# Altium PCB reg_PCB.PcbDoc
Units mm, origin at the board's own origin, x right, y up, seen from the top; angles counter-clockwise.
Board outline 257.2 x 94.8 mm, 4 copper layers (Top Layer, Layer 2, Layer 3, Bottom Layer), stack 0.742 mm thick; 88 components, 30 nets, 176 pads, 45 vias.
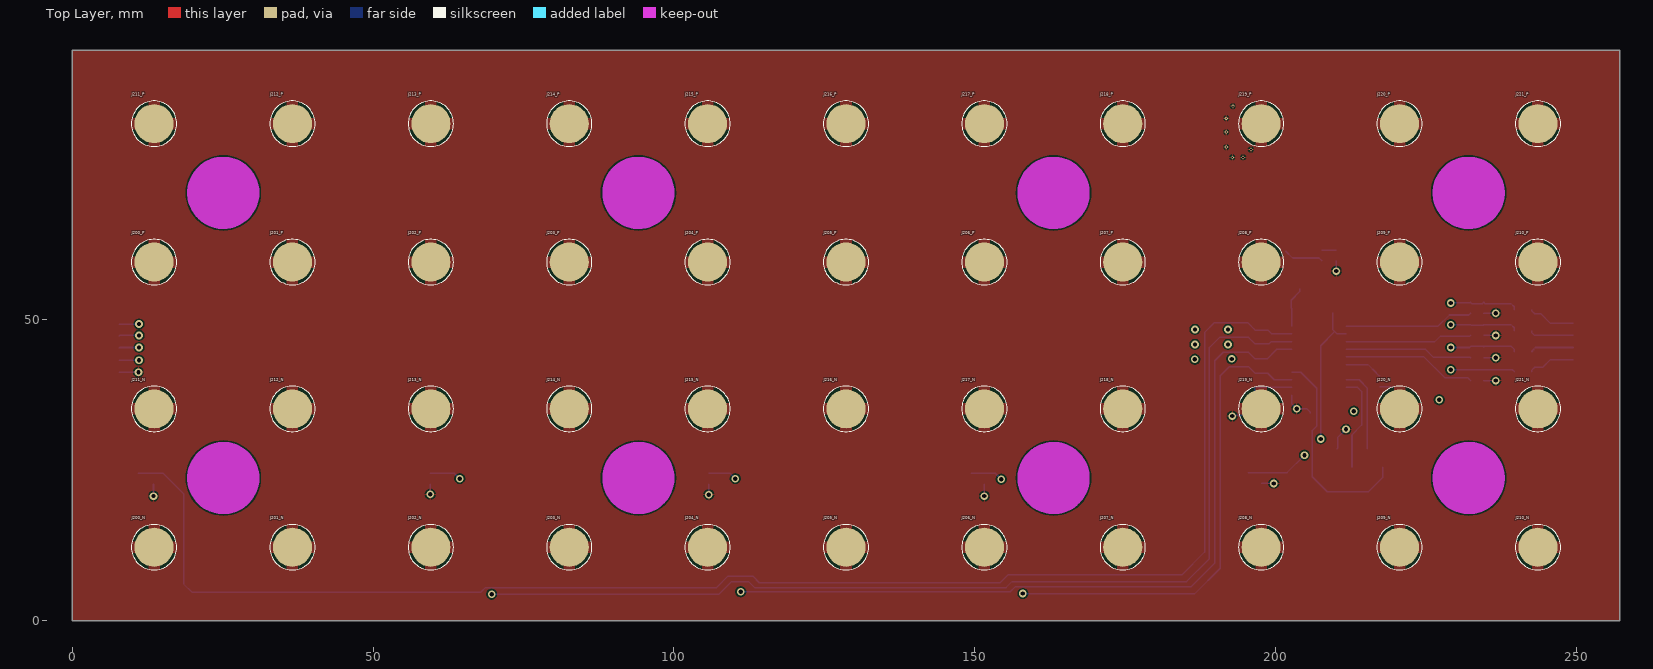
[diagram p0: Top Layer view]
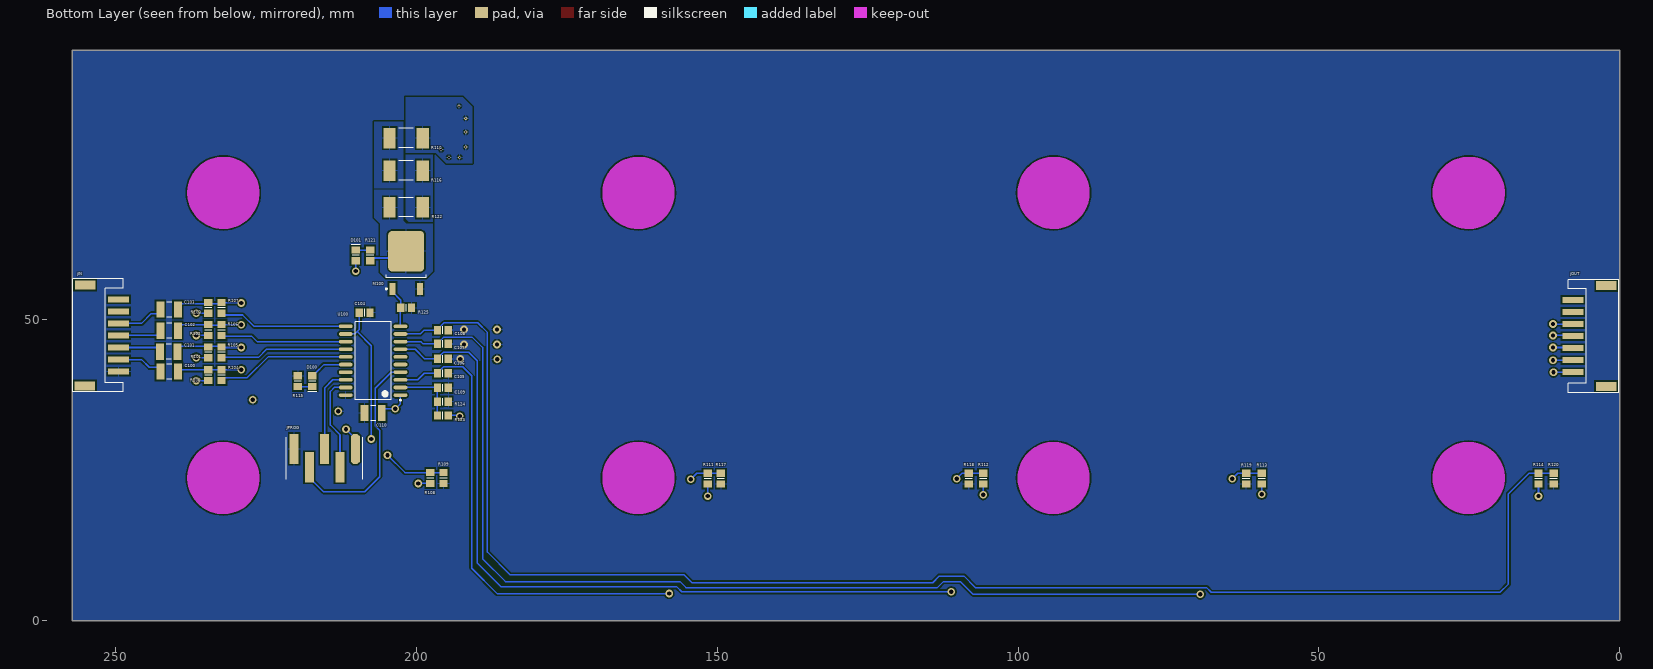
[diagram p1: Bottom Layer view, seen from below]
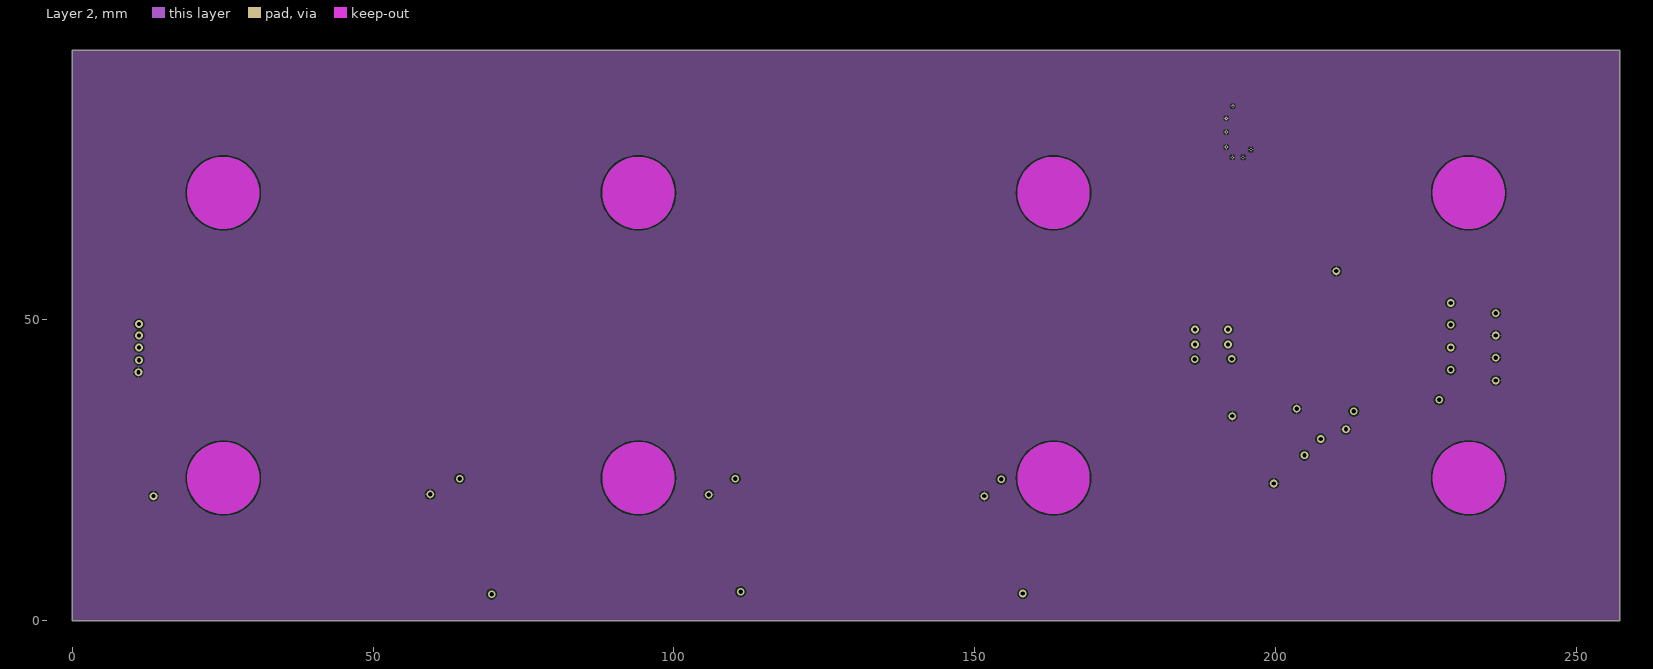
[diagram p2: Layer 2]
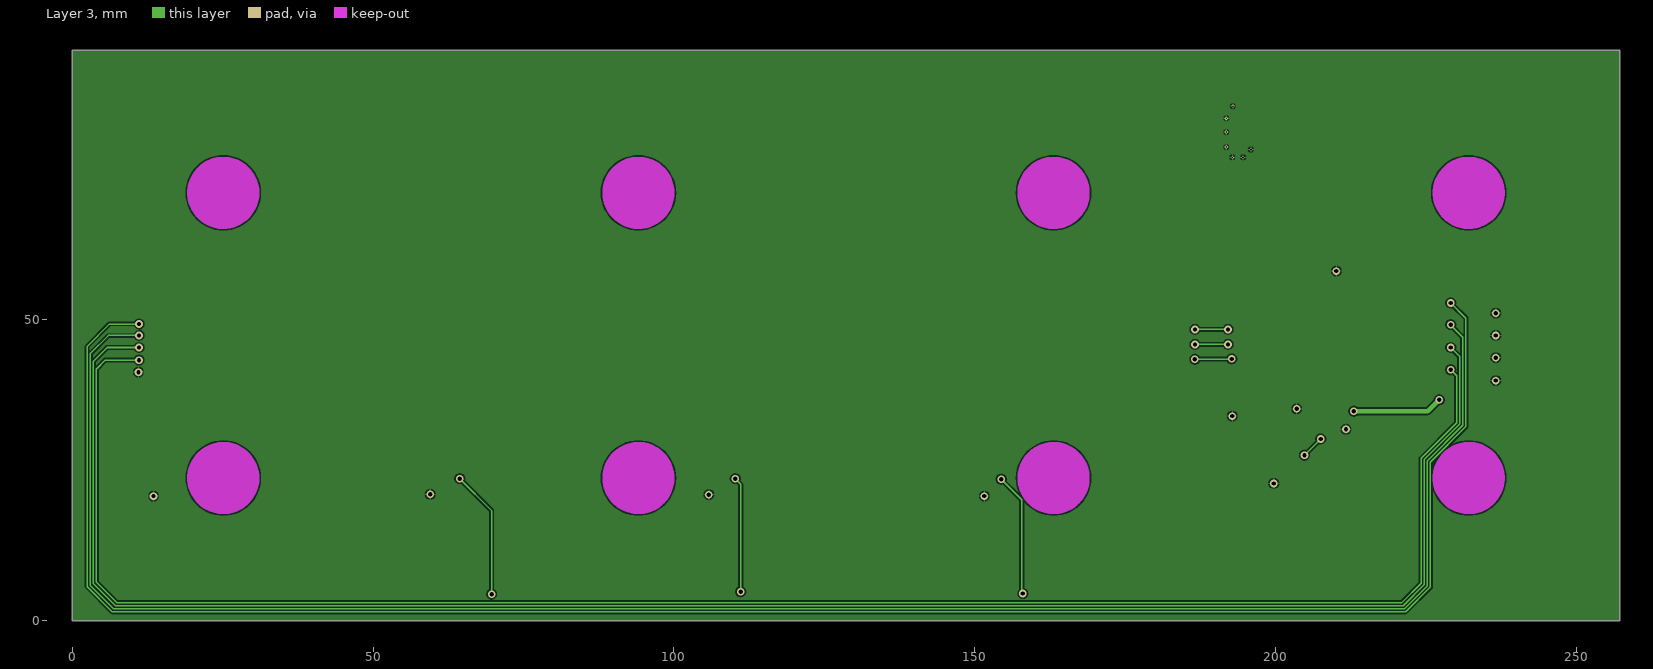
[diagram p3: Layer 3]

## Layer stack, top to bottom
Top Solder: solder mask 0.0102, Solder Resist, Dk 3.5
Top Layer: signal copper 0.07
Dielectric 2: prepreg 0.0711, PP-006, Dk 4.1
Layer 2: signal copper 0.07
Dielectric 1: dielectric 0.32, FR-4, Dk 4.8
Layer 3: signal copper 0.07
Dielectric 3: prepreg 0.0711, PP-006, Dk 4.1
Bottom Layer: signal copper 0.07
Bottom Solder: solder mask 0.0102, Solder Resist, Dk 3.5

## Board outline
0,0 257.2,0 257.2,94.8 0,94.8

## Design rules (kind name [scope] priority, off if disabled: settings)
Clearance [All] p1: gap=0.254 ignorepadtopadclearanceinfootprint=FALSE except(0: SMDPad-Hole THPad-Hole Via-Hole Fill-Hole Poly-Hole Region-Hole Text-Hole; 0.127: SMDPad-SMDPad; 0.15: Arc-Text Track-Text SMDPad-Text THPad-Text Via-Text Fill-Text Poly-Text Region-Text Text-Text; 0.2: Arc-SMDPad Arc-Hole Track-SMDPad Track-Hole; 0.5: SMDPad-THPad)
HoleSize [All] p1: absolutevalues=TRUE maxlimit=6.3 minlimit=0.025 maxpercent=80.000 minpercent=20.000
PolygonConnect [All] p1: connectstyle=Relief reliefconductorwidth=0.254 reliefentries=4 polygonreliefangle="90 Angle" airgapwidth=0.254
RoutingVias [All] p1: holewidth=0.25 width=0.52 viastyle="Through Hole" minholewidth=0.2 minwidth=0.46 maxholewidth=2 maxwidth=4
SilkToSolderMaskClearance [IsPad] p1: minsilkscreentomaskgap=0.15 clearancetoexposedcopper=TRUE
SolderMaskExpansion [All] p1: expansion=0.102 istentingtop=FALSE
Width [All] p1: maxlimit=5 minlimit=0.2 preferedwidth=0.25
28 further rules are at their usual default settings.

## Classes and differential pairs
channel class "Pg2 Battery Contacts": N P
component class P: J200_P J201_P J202_P J203_P J204_P J205_P J206_P J207_P J208_P J209_P J210_P J211_P J212_P J213_P J214_P J215_P J216_P J217_P J218_P J219_P J220_P J221_P
component class "Pg1 Microcontroller": C100 C101 C102 C103 C104 C105 C106 C107 C108 C109 C110 D100 D101 jIN jOUT JPROG M100 R100 R101 R102 R103 R104 R105 R106 R107 R108 R109 R110 R111 R112 R113 R114 R115 R116 R117 R118 R119 R120 R121 R122 R123 R124 R125 U100
component class N: J200_N J201_N J202_N J203_N J204_N J205_N J206_N J207_N J208_N J209_N J210_N J211_N J212_N J213_N J214_N J215_N J216_N J217_N J218_N J219_N J220_N J221_N

## Components (designator, comment, footprint, x,y, rotation, side; value= is the part's Value field where it differs from the comment)
C100 "C1210C106K3RACAUTO" CAPC3225N 241.1,41.4 r180 bottom value=10µF
C101 "C1210C106K3RACAUTO" CAPC3225N 241.15,44.7 r180 bottom value=10µF
C102 "C1210C106K3RACAUTO" CAPC3225N 241.1,48.2 r180 bottom value=10µF
C103 "C1210C106K3RACAUTO" CAPC3225N 241.1,51.7 r180 bottom value=10µF
C104 "C0805C104K1RACAUTO" CAPC2012N 208.6,51.2 r180 bottom value=100nF
C105 "C0805C104K1RACAUTO" CAPC2012N 195.6,41.1 r180 bottom value=100nF
C106 "C0805C104K1RACAUTO" CAPC2012N 195.6,43.5 r180 bottom value=100nF
C107 "C0805C104K1RACAUTO" CAPC2012N 195.6,46 r180 bottom value=100nF
C108 "C0805C104K1RACAUTO" CAPC2012N 195.6,48.3 r180 bottom value=100nF
C109 "C0805C104K1RACAUTO" CAPC2012N 195.6,38.7 r180 bottom value=100nF
C110 "C1210C106K3RACAUTO" CAPC3225N 207.2,34.5 r180 bottom value=10µF
D100 "LTST-C170GKT" DIO2012N-G 217.3,39.8 r270 bottom value=GRN
D101 "LTST-C170KRKT" DIO2012N-R 210.1,60.7 r90 bottom value=RED
J200_N "2036-3-57-15-00-00-03-0" "6mm Pad" 13.6,12.2 r0 top locked (schematic designator J200)
J200_P "2036-3-57-15-00-00-03-0" "6mm Pad" 13.6,59.6 r0 top (schematic designator J200)
J201_N "2036-3-57-15-00-00-03-0" "6mm Pad" 36.6,12.2 r0 top locked (schematic designator J201)
J201_P "2036-3-57-15-00-00-03-0" "6mm Pad" 36.6,59.6 r0 top (schematic designator J201)
J202_N "2036-3-57-15-00-00-03-0" "6mm Pad" 59.6,12.2 r0 top locked (schematic designator J202)
J202_P "2036-3-57-15-00-00-03-0" "6mm Pad" 59.6,59.6 r0 top (schematic designator J202)
J203_N "2036-3-57-15-00-00-03-0" "6mm Pad" 82.6,12.2 r0 top locked (schematic designator J203)
J203_P "2036-3-57-15-00-00-03-0" "6mm Pad" 82.6,59.6 r0 top (schematic designator J203)
J204_N "2036-3-57-15-00-00-03-0" "6mm Pad" 105.6,12.2 r0 top locked (schematic designator J204)
J204_P "2036-3-57-15-00-00-03-0" "6mm Pad" 105.6,59.6 r0 top (schematic designator J204)
J205_N "2036-3-57-15-00-00-03-0" "6mm Pad" 128.6,12.2 r0 top locked (schematic designator J205)
J205_P "2036-3-57-15-00-00-03-0" "6mm Pad" 128.6,59.6 r0 top (schematic designator J205)
J206_N "2036-3-57-15-00-00-03-0" "6mm Pad" 151.6,12.2 r0 top locked (schematic designator J206)
J206_P "2036-3-57-15-00-00-03-0" "6mm Pad" 151.6,59.6 r0 top (schematic designator J206)
J207_N "2036-3-57-15-00-00-03-0" "6mm Pad" 174.6,12.2 r0 top locked (schematic designator J207)
J207_P "2036-3-57-15-00-00-03-0" "6mm Pad" 174.6,59.6 r0 top (schematic designator J207)
J208_N "2036-3-57-15-00-00-03-0" "6mm Pad" 197.6,12.2 r0 top locked (schematic designator J208)
J208_P "2036-3-57-15-00-00-03-0" "6mm Pad" 197.6,59.6 r0 top (schematic designator J208)
J209_N "2036-3-57-15-00-00-03-0" "6mm Pad" 220.6,12.2 r0 top locked (schematic designator J209)
J209_P "2036-3-57-15-00-00-03-0" "6mm Pad" 220.6,59.6 r0 top (schematic designator J209)
J210_N "2036-3-57-15-00-00-03-0" "6mm Pad" 243.6,12.2 r0 top locked (schematic designator J210)
J210_P "2036-3-57-15-00-00-03-0" "6mm Pad" 243.6,59.6 r0 top (schematic designator J210)
J211_N "2036-3-57-15-00-00-03-0" "6mm Pad" 13.6,35.2 r0 top locked (schematic designator J211)
J211_P "2036-3-57-15-00-00-03-0" "6mm Pad" 13.6,82.6 r0 top (schematic designator J211)
J212_N "2036-3-57-15-00-00-03-0" "6mm Pad" 36.6,35.2 r0 top locked (schematic designator J212)
J212_P "2036-3-57-15-00-00-03-0" "6mm Pad" 36.6,82.6 r0 top (schematic designator J212)
J213_N "2036-3-57-15-00-00-03-0" "6mm Pad" 59.6,35.2 r0 top locked (schematic designator J213)
J213_P "2036-3-57-15-00-00-03-0" "6mm Pad" 59.6,82.6 r0 top (schematic designator J213)
J214_N "2036-3-57-15-00-00-03-0" "6mm Pad" 82.6,35.2 r0 top locked (schematic designator J214)
J214_P "2036-3-57-15-00-00-03-0" "6mm Pad" 82.6,82.6 r0 top (schematic designator J214)
J215_N "2036-3-57-15-00-00-03-0" "6mm Pad" 105.6,35.2 r0 top locked (schematic designator J215)
J215_P "2036-3-57-15-00-00-03-0" "6mm Pad" 105.6,82.6 r0 top (schematic designator J215)
J216_N "2036-3-57-15-00-00-03-0" "6mm Pad" 128.6,35.2 r0 top locked (schematic designator J216)
J216_P "2036-3-57-15-00-00-03-0" "6mm Pad" 128.6,82.6 r0 top (schematic designator J216)
J217_N "2036-3-57-15-00-00-03-0" "6mm Pad" 151.6,35.2 r0 top locked (schematic designator J217)
J217_P "2036-3-57-15-00-00-03-0" "6mm Pad" 151.6,82.6 r0 top (schematic designator J217)
J218_N "2036-3-57-15-00-00-03-0" "6mm Pad" 174.6,35.2 r0 top locked (schematic designator J218)
J218_P "2036-3-57-15-00-00-03-0" "6mm Pad" 174.6,82.6 r0 top (schematic designator J218)
J219_N "2036-3-57-15-00-00-03-0" "6mm Pad" 197.6,35.2 r0 top locked (schematic designator J219)
J219_P "2036-3-57-15-00-00-03-0" "6mm Pad" 197.6,82.6 r0 top (schematic designator J219)
J220_N "2036-3-57-15-00-00-03-0" "6mm Pad" 220.6,35.2 r0 top locked (schematic designator J220)
J220_P "2036-3-57-15-00-00-03-0" "6mm Pad" 220.6,82.6 r0 top (schematic designator J220)
J221_N "2036-3-57-15-00-00-03-0" "6mm Pad" 243.6,35.2 r0 top locked (schematic designator J221)
J221_P "2036-3-57-15-00-00-03-0" "6mm Pad" 243.6,82.6 r0 top (schematic designator J221)
jIN "S7B-PH-SM4-TB(LF)(SN)" JST-PH-S7 249.5,47.4 r90 bottom
jOUT "S7B-PH-SM4-TB(LF)(SN)" JST-PH-S7 7.8,47.3 r270 bottom
JPROG "3-647167-5" "HDR1X5 SMT" 215.24,27.02 r0 bottom
M100 "AOD454A" TO252-3N 201.7,59.5 r90 bottom value="30mOhm @ 10V"
R100 "ERJ-6ENF1003V" RESC2012N 234.6,40.8 r270 bottom value=100k
R101 "ERJ-6ENF1003V" RESC2012N 234.6,44.6 r90 bottom value=100k
R102 "ERJ-6ENF1003V" RESC2012N 234.6,48.3 r270 bottom value=100k
R103 "ERJ-6ENF1003V" RESC2012N 234.6,52 r90 bottom value=100k
R104 "ERJ-6ENF10R0V" RESC2012N 232.4,40.8 r90 bottom value=10
R105 "ERJ-6ENF10R0V" RESC2012N 232.4,44.6 r270 bottom value=10
R106 "ERJ-6ENF10R0V" RESC2012N 232.4,48.3 r90 bottom value=10
R107 "ERJ-6ENF10R0V" RESC2012N 232.4,52 r270 bottom value=10
R108 "NT08105F4050B1F" RESC2012N 197.7,23.7 r90 bottom value=100k
R109 "ERJ-6ENF1003V" RESC2012N 195.5,23.7 r90 bottom value=100k
R110 "35221R0JT" RESC6432N 201.7,80.2 r180 bottom value=1
R111 "NT08105F4050B1F" RESC2012N 151.6,23.6 r90 bottom value=100k
R112 "NT08105F4050B1F" RESC2012N 105.8,23.6 r90 bottom value=100k
R113 "NT08105F4050B1F" RESC2012N 59.5,23.6 r90 bottom value=100k
R114 "NT08105F4050B1F" RESC2012N 13.5,23.6 r90 bottom value=100k
R115 "ERJ-6ENF1002V" RESC2012N 219.7,39.8 r270 bottom value=10k
R116 "35221R0JT" RESC6432N 201.7,74.8 r0 bottom value=1
R117 "ERJ-6ENF1003V" RESC2012N 149.4,23.6 r90 bottom value=100k
R118 "ERJ-6ENF1003V" RESC2012N 108.2,23.6 r90 bottom value=100k
R119 "ERJ-6ENF1003V" RESC2012N 62.1,23.6 r90 bottom value=100k
R120 "ERJ-6ENF1003V" RESC2012N 11,23.6 r90 bottom value=100k
R121 "ERJ-6ENF1002V" RESC2012N 207.7,60.7 r90 bottom value=10k
R122 "35221R0JT" RESC6432N 201.7,68.7 r180 bottom value=1
R123 "ERJ-6ENF4993V" RESC2012N 195.6,34.1 r180 bottom value=499k
R124 "ERJ-6ENF1004V" RESC2012N 195.6,36.4 r0 bottom value=1Meg
R125 "ERJ-6ENF1002V" RESC2012N 201.7,52 r0 bottom value=10k
U100 "PIC16F1508T-I/SO" SOIC-20-300 207.2,43.2 r0 bottom value=32MHz

## Footprints (in the part's own frame and the unit in brackets; to place one, negate y for a bottom-side part, rotate by r counter-clockwise, add the part's x,y. Pads: shape width x height; smd on the part's side, far side on the other; paste and mask are expansions set on the pad)
"6mm Pad" [mm] "Pad, 6mm"
  round 6.5 smd mask+0.508: 1(0,0)
  silkscreen extent -3.78,-3.77 3.78,3.77, body extent -3,-3 3,3, height 1.4
CAPC2012N [mm] "Chip Capacitor, Body 2.0x1.3mm, IPC Medium Density"
  rect 1.2x1.4 smd: 1(-0.9,0) 2(0.9,0)
  silkscreen extent 0,-0.6 0,0.6, body extent -1.07,-0.7 1.07,0.7, height 0.7
CAPC3225N [mm] "Chip Capacitor Body 3.2x2.5mm, IPC Medium Density"
  rect 1.3x2.7 smd: 1(-1.45,0) 2(1.45,0)
  silkscreen extent -0.4,-1.25 0.4,1.25, body extent -1.67,-1.32 1.67,1.32, height 1.5
DIO2012N-G [mm] "Chip Diode, Body 2.0x1.2mm, Medium Density"
  rect 1.2x1.4 smd: 1(-0.9,0) 2(0.9,0)
  silkscreen extent 0,-0.76 1.78,0.76, body extent -1.07,-0.7 1.07,0.7, height 0.7
DIO2012N-R [mm] "Chip Diode, Body 2.0x1.2mm, Medium Density"
  rect 1.2x1.4 smd: 1(-0.9,0) 2(0.9,0)
  silkscreen extent 0,-0.76 1.78,0.76, body extent -1.07,-0.7 1.07,0.7, height 0.7
"HDR1X5 SMT" [mm] "Connector; Header; Surface Mounted; 5 Position"
  oct 1.5x5 smd: 1(-5.08,-1.52)
  rect 1.5x5 smd: 2(-2.54,1.52) 3(0,-1.52) 4(2.54,1.52) 5(5.08,-1.52)
  silkscreen extent -6.36,-3.5 6.36,3.5, body extent -6.36,-3.55 6.36,2.85, height 10.67
JST-PH-S7 [mm] "Locking Connector; Side-Entry; Header; 7-Pin, 2mm pitch"
  rect 1x3.5 smd: 1(-6,0) 2(-4,0) 3(-2,0) 4(0,0) 5(2,0) 6(4,0) 7(6,0)
  rect 1.5x3.4 smd: 8(-8.382,5.588) 9(8.35,5.55)
  silkscreen extent -9.4,-0.76 9.4,7.62, body extent -8.95,-1.49 8.95,7.11, height 5.5
RESC2012N [mm] "Chip Resistor, Body 2.0x1.2mm, IPC Medium Density"
  rect 1.2x1.4 smd: 1(-0.9,0) 2(0.9,0)
  silkscreen extent 0,-0.6 0,0.6, body extent -1.07,-0.7 1.07,0.7, height 0.7
RESC6432N [mm] "Chip Resistor, Body 6.4x3.2mm, IPC Medium Density"
  rect 2x3.4 smd: 1(-2.75,0) 2(2.75,0)
  silkscreen extent -1.2,-1.6 1.2,1.6, body extent -3.3,-1.7 3.3,1.7, height 1.2
SOIC-20-300 [mm] "20-Pin Plastic Wide Body Small Outline Integrated Circuit 1.27 mm Pitch, IPC Medium Density"
  oval 2.3x0.6 smd: 1(-4.55,5.715) 2(-4.55,4.445) 3(-4.55,3.175) 4(-4.55,1.905) 5(-4.55,0.635) 6(-4.55,-0.635) 7(-4.55,-1.905) 8(-4.55,-3.175) 9(-4.55,-4.445) 10(-4.55,-5.715) 11(4.55,-5.715) 12(4.55,-4.445) 13(4.55,-3.175) 14(4.55,-1.905) 15(4.55,-0.635) 16(4.55,0.635) 17(4.55,1.905) 18(4.55,3.175) 19(4.55,4.445) 20(4.55,5.715)
  silkscreen extent -4.67,-6.5 3,6.69, body extent -3.75,-6.4 3.75,6.4, height 2.65
TO252-3N [mm] "D-PAK, 4-Leads, Body 6.1x6.5mm, Pitch 2.28mm, Lead Span 9.7mm, IPC Medium Density"
  rect 2x1 smd: 1(-4.35,2.28) 3(-4.35,-2.28)
  rrect25% 6.8x6 smd: 2(1.9,0)
  silkscreen extent -4.47,-3.35 -2,3.43, body extent -5.02,-3.27 4.95,3.27, height 2.39

## Part data
C100 C101 C102 C103 C110: "Capacitor, Ceramic, 10µF, 25V, 0805, 10%, 125C", Supplier Part Number 1=399-7046-1-ND, Temp=125C, Category=C, Rated=25V, Supplier 1=Digi-Key, Tol=10%
C104 C105 C106 C107 C108 C109: "Capacitor, Ceramic, 100nF, 100V, 0805, 10%, 125C", Supplier Part Number 1=399-6926-1-ND, Temp=125C, Category=C, Rated=100V, Supplier 1=Digi-Key, Tol=10%
D100: "LED, SMT 0805, Green, 2.1V, 10mA", Supplier Part Number 1=160-1179-1-ND, Category=D, Rated="2.1V, 10mA, 6mcd", Supplier 1=Digi-Key
D101: "LED, SMT 0805, Red, 2.0V, 20mA", Supplier Part Number 1=160-1415-1-ND, Category=D, Rated="2.0V, 20mA, 54mcd", Supplier 1=Digi-Key
J200_N J200_P J201_N J201_P J202_N J202_P J203_N J203_P J204_N J204_P J205_N J205_P J206_N J206_P J207_N J207_P J208_N J208_P J209_N J209_P J210_N J210_P J211_N J211_P J212_N J212_P J213_N J213_P J214_N J214_P J215_N J215_P J216_N J216_P J217_N J217_P J218_N J218_P J219_N J219_P J220_N J220_P J221_N J221_P: "Hardware, Sprint Contact Surface", Supplier Part Number 1=54-2036-3-57-15-00-00-03-0CT-ND, Supplier 1=Digi-Key
jIN jOUT: "Header, JST, 7-Pin, Right-Angle, PH, Surface Mount", Supplier Part Number 1=455-1754-1-ND, Category=J, Supplier 1=Digi-Key
JPROG: library part "Hdr 3-647167-5", "Header, 1x5-Pin, SMT, 100mil Pitch", Supplier Part Number 1=A144616-ND, Category=J, Supplier 1=Digi-Key
M100: "MOSFET, N-Ch, 40V, 20A, 430mOhm, TO252", Supplier Part Number 1=785-1223-1-ND, Category=M, Rated="40V, 20A", Supplier 1=Digi-Key, Vgs(th)=3.0V
R100 R101 R102 R103 R109 R117 R118 R119 R120: "Resistor, Fixed, 100 kOhm, 0805, 1%, 1/8W", Supplier Part Number 1=P100KCCT-ND, Category=R, Rated=1/8W, Supplier 1=Digi-Key, Tol=1%
R104 R105 R106 R107: "Resistor, Fixed, 10 Ohm, 0805, 1%, 1/8W", Supplier Part Number 1=P10.0CCT-ND, Category=R, Rated=1/8W, Supplier 1=Digi-Key, Tol=1%
R108 R111 R112 R113 R114: library part NTCS0805E3103FMT, "Resistor, NTC Thermistor, 100kOhm, 0805, 1%, 125C", Supplier Part Number 1=283-NT08105F4050B1FCT-ND, Temp=150C, Category=R, Rated=3570K, Supplier 1=DigiKey, Tol=1%
R110 R116 R122: "Resistor, Power, 1 Ohm, 6432, 5%, 3W", Supplier Part Number 1=A121177CT-ND, Category=R, Rated=3W, Supplier 1=Digi-Key, Tol=5%
R115 R121 R125: "Resistor, Fixed, 10 kOhm, 0805, 1%, 1/8W", Supplier Part Number 1=P10.0KCCT-ND, Category=R, Rated=1/8W, Supplier 1=Digi-Key, Tol=1%
R123: "Resistor, Fixed, 499 kOhm, 0805, 1%, 1/8W", Supplier Part Number 1=P499KCCT-ND, Category=R, Rated=1/8W, Supplier 1=Digi-Key, Tol=1%
R124: "Resistor, Fixed, 1 MOhm, 0805, 1%, 1/8W", Supplier Part Number 1=P1.00MCCT-ND, Category=R, Rated=1/8W, Supplier 1=Digi-Key, Tol=1%
U100: "MCU, 8-Bit, 5V, 32MHz, 20-Pin SOIC", Supplier Part Number 1=PIC16F1578-I/SS-ND, Temp=85C, Category=U, Rated="2.3V ~ 5.5V", Supplier 1=Digi-Key

## Free pads (board coordinates)
  round 1.524 hole 5.4: 2(25.1,23.7) 4(94.1,23.7) 5(94.1,71.1) 7(163.1,23.7) 8(232.1,71.1) 9(232.1,23.7)
  round 1 hole 5.4: 3(25.1,71.1)
  round 1 hole 5.4 mask+0.102: 6(163.1,71.1)

## Via types
v1: diameter 1.27, hole 0.711, Top Layer to Bottom Layer, 38 vias
v2: diameter 0.5, hole 0.3, Top Layer to Bottom Layer, 7 vias

## Nets (pads, with @x,y where several pads share a name; then routed paths per layer and width w, separated by ;. In a path a pad name is that pad's centre, name@x,y a point inside that pad or via, vN(x,y) a via of type N, cw(c..) or ccw(c..) an arc to the next point about the centre after c; other vN are vias at no path point)
BAL: M100.1 R125.2 U100.10 | length 6.8
  Bottom Layer w0.254: U100.10 202.65,51.95 R125.2 202.6,53.27 203.98,54.65 M100.1
ICSPCLK: JPROG.3 U100.18 | length 14.2
  Bottom Layer w0.254: U100.18 213.895,40.025 215.24,38.68 JPROG.3
ICSPDAT: JPROG.2 U100.19 | length 16.1
  Bottom Layer w0.254: U100.19 213.645,38.755 214.3,38.1 214.3,32.5 212.7,30.9 JPROG.2
LED: D100.1 U100.16 | length 6.3
  Bottom Layer w0.254: U100.16 215.344,42.565 216.727,41.182 216.727,41.173 217.2,40.7 D100.1
MCLR: JPROG.4 U100.4 | length 35.8
  Bottom Layer w0.254: U100.4 204.181,41.295 206.842,38.634 206.842,32.353 206.1,31.611 206.1,23.9 208.58,21.42 215.45,21.42 217.78,23.75 JPROG.4
NetD100_2: D100.2 R115.2 | length 2.4
  Bottom Layer w0.254: D100.2 R115.2
NetD101_2: D101.2 R121.2 | length 2.4
  Bottom Layer w0.254: R121.2 D101.2
NetM100_2: M100.2 R121.1 R122.1 | length 6.7
  Bottom Layer w0.254: M100.2 202.827,60.273 207.227,60.273 R121.1
NetR110_1: R110.1 R116.2
NetR116_1: R116.1 R122.2
SCL: R107.2 U100.11 | length 21.6
  Bottom Layer w0.254: U100.11 227.015,48.915 228.9,50.8 232.1,50.8 R107.2
SCL_IN: C103.1 jIN.5 | length 8
  Bottom Layer w0.254: C103.1 242.55,51.523 243.073,51 244.1,51 245.7,49.4 jIN.5
SCL_OUT: C103.2 jOUT.3 R103.2 R107.1 | length 342.3
  Layer 3 w0.254: v1(11.1,49.3) 6.2,49.3 2.476,45.576 2.476,5.624 6.624,1.476 221.631,1.476 225.724,5.569 225.724,21.052 225.719,21.057 225.719,26.343 231.624,32.248 231.624,50.276 v1(229.1,52.8)
  Bottom Layer w0.254: jOUT.3 v1(11.1,49.3) ; v1(229.1,52.8) 232.3,52.8 R107.1 232.6,52.7 234.4,52.7 R103.2 234.8,52.7 239.127,52.7 239.65,52.177 C103.2
SDA: R106.1 U100.13 | length 21.1
  Bottom Layer w0.254: U100.13 226.475,46.375 227.4,47.3 232.3,47.3 R106.1
SDA_IN: C102.1 jIN.4 | length 7.4
  Bottom Layer w0.254: C102.1 242.55,47.923 243.073,47.4 jIN.4
SDA_OUT: C102.2 jOUT.4 R102.1 R106.2 | length 334.7
  Layer 3 w0.254: v1(11.1,47.4) 6,47.4 2.984,44.384 2.984,5.834 6.834,1.984 221.421,1.984 225.216,5.779 225.216,20.841 225.211,20.846 225.211,26.554 231.116,32.459 231.116,47.084 229.1,49.1 v1(229.1,49.2)
  Bottom Layer w0.254: jOUT.4 7.9,47.4 v1(11.1,47.4) ; v1(229.1,49.2) R106.2 232.5,49.1 234.5,49.1 R102.1 239.127,49.2 239.65,48.677 C102.2
ST_CH: R104.1 U100.15 | length 22.3
  Bottom Layer w0.254: U100.15 224.665,43.835 228.1,40.4 231.192,40.4 231.219,40.373 231.927,40.373 R104.1
ST_CH_IN: C100.1 jIN.2 | length 7.9
  Bottom Layer w0.254: C100.1 242.55,41.577 243.073,42.1 244.4,42.1 245.7,43.4 jIN.2
ST_CH_OUT: C100.2 jOUT.6 R100.1 R104.2 | length 318.3
  Layer 3 w0.254: v1(11.1,43.3) 5.5,43.3 4,41.8 4,6.4 7.4,3 221,3 224.2,6.2 224.2,20.421 224.195,20.426 224.195,26.974 230.1,32.879 230.1,40.7 v1(229.1,41.7)
  Bottom Layer w0.254: jOUT.6 v1(11.1,43.3) ; v1(229.1,41.7) R104.2 ; R104.2@232.5,41.7 R100.1 239.35,41.7 C100.2
ST_DIS: R105.2 U100.14 | length 21.2
  Bottom Layer w0.254: U100.14 224.895,45.105 226.245,43.755 232.345,43.755 R105.2
ST_DIS_IN: C101.1 jIN.3 | length 7.8
  Bottom Layer w0.254: C101.1@242.95,45.05 C101.1 242.6,44.877 243.123,45.4 jIN.3
ST_DIS_OUT: C101.2 jOUT.5 R101.2 R105.1 | length 326.8
  Layer 3 w0.254: v1(11.1,45.4) 5.8,45.4 3.492,43.092 3.492,6.19 7.19,2.492 221.21,2.492 224.708,5.99 224.708,20.631 224.703,20.636 224.703,26.764 230.608,32.669 230.608,43.892 v1(229.1,45.4)
  Bottom Layer w0.254: jOUT.5 7.9,45.4 v1(11.1,45.4) ; v1(229.1,45.4) 232.3,45.4 232.5,45.6 234.5,45.6 R101.2 234.7,45.6 238.8,45.6 238.818,45.582 239.177,45.582 239.7,45.059 C101.2
TSNS1: C104.1 R108.2 R109.2 U100.12 | length 38.5
  Layer 3 w0.254: v1(204.8,27.5) v1(207.5,30.2)
  Bottom Layer w0.254: R109.2 201.9,24.6 v1(204.8,27.5) ; v1(207.5,30.2) 207.5,45.7 209.8,48 209.9,48 ; C104.1 209.5,48.4 209.85,48.05 210.255,47.645 U100.12
TSNS2: C105.1 R111.2 R117.2 U100.3 | length 105.9
  Layer 3 w0.254: v1(154.4,23.5) 157.806,20.094 157.806,4.694 v1(158,4.5)
  Bottom Layer w0.254: R117.2 R111.2 153.4,24.5 v1(154.4,23.5) ; v1(158,4.5) 186.6,4.5 190.8,8.7 190.8,40.7 192.3,42.2 195.5,42.2 196.5,41.2 C105.1 198.7,41.1 199.775,40.025 U100.3
TSNS3: C106.1 R112.2 R118.2 U100.7 | length 152.8
  Layer 3 w0.254: v1(110.2,23.6) 110.2,23.574 111.1,22.674 v1(111.1,4.8)
  Bottom Layer w0.254: R112.2 R118.2 109.3,24.5 v1(110.2,23.6) ; v1(111.1,4.8) 155.9,4.8 156.7,5.6 185.9,5.6 189.9,9.6 189.9,43.2 191.3,44.6 195.5,44.6 196.5,43.6 C106.1 198.6,43.5 200.205,45.105 U100.7
TSNS4: C107.1 R113.2 R119.2 U100.8 | length 199.3
  Layer 3 w0.254: v1(64.4,23.6) 69.7,18.3 v1(69.7,4.4)
  Bottom Layer w0.254: R113.2 R119.2 63.5,24.5 v1(64.4,23.6) ; v1(69.7,4.4) 107.5,4.4 109.6,6.5 112.4,6.5 113.4,5.5 155.2,5.5 156.2,6.5 185.2,6.5 189,10.3 189,45.4 190.681,47.081 195.519,47.081 196.5,46.1 C107.1 198.9,46 199.275,46.375 U100.8
TSNS5: C108.1 R114.2 R120.2 U100.9 | length 250.3
  Bottom Layer w0.254: R120.2 R114.2 15.1,24.5 18.5,21.1 18.5,6.1 19.9,4.7 67.9,4.7 68.7,5.5 107.1,5.5 109,7.4 113.1,7.4 114.2,6.3 154.2,6.3 155.5,7.6 184.4,7.6 188.2,11.4 188.2,47.9 189.8,49.5 195.4,49.5 196.5,48.4 C108.1 198.7,48.3 199.355,47.645 U100.9
VNEG: C104.2 C105.2 C106.2 C107.2 C108.2 C109.2 C110.1 jIN.1 JPROG.5 M100.3 R109.1 R115.1 R117.1 R118.1 R119.1 R120.1 R124.1 R125.1 U100.20 | length 32.1
  Layer 3 w0.254: v1(186.582,43.434) 186.615,43.467 192.667,43.467 v1(192.7,43.5) ; v1(186.6,45.9) v1(192.1,45.9) ; v1(186.6,48.4) v1(192.1,48.4)
  Layer 3 w0.75: v1(213,34.8) 225.3,34.8 v1(227.2,36.7)
VPOS: C110.2 D101.1 J200_N.1 J200_P.1 J201_N.1 J201_P.1 J202_N.1 J202_P.1 J203_N.1 J203_P.1 J204_N.1 J204_P.1 J205_N.1 J205_P.1 J206_N.1 J206_P.1 J207_N.1 J207_P.1 J208_N.1 J208_P.1 J209_N.1 J209_P.1 J210_N.1 J210_P.1 J211_N.1 J211_P.1 J212_N.1 J212_P.1 J213_N.1 J213_P.1 J214_N.1 J214_P.1 J215_N.1 J215_P.1 J216_N.1 J216_P.1 J217_N.1 J217_P.1 J218_N.1 J218_P.1 J219_N.1 J219_P.1 J220_N.1 J220_P.1 J221_N.1 J221_P.1 jOUT.7 JPROG.1 R100.2 R101.1 R102.2 R103.1 R108.1 R110.2 R111.1 R112.1 R113.1 R114.1 R123.2 U100.1 | length 33.5
  Bottom Layer w0.254: jOUT.7 v1(11,41.3) ; v1(13.5,20.7) R114.1 ; v1(59.5,21) R113.1 ; v1(105.8,20.931) R112.1 ; v1(151.6,20.7) R111.1 ; v1(192.8,34) 192.9,34.1 R123.2 ; R108.1 v1(199.7,22.8) ; U100.1 202.65,36.05 v1(203.5,35.2) 205.227,35.2 205.75,34.677 C110.2 ; v1(210.1,58.1) D101.1 ; JPROG.1 210.353,28.733 210.353,30.468 211.685,31.8 v1(211.7,31.8) ; R100.2 v1(236.6,39.9) ; R101.1 v1(236.6,43.7) ; R102.2 v1(236.6,47.4) ; R103.1 v1(236.6,51.1)
  other v2: 192.8,77 194.6,77 195.9,78.3 191.8,78.7 191.8,81.2 191.8,83.5 192.9,85.5
VSNS: C109.1 R123.1 R124.2 U100.2 | length 10.8
  Bottom Layer w0.254: R123.1 R124.2 C109.1 196.555,38.755 U100.2
pads on no net: jIN.6 jIN.7 jIN.8 jIN.9 jOUT.1 jOUT.2 jOUT.8 jOUT.9 U100.5 U100.6 U100.17

## Polygon pours and split planes (outlines as drawn)
VPOS on Top Layer "VPOS_L01_P006" (solid, pour order 6): 257.2,0 257.2,94.8 0,94.8 0,0
VPOS on Top Layer "VPOS_L01_P000" (solid, pour order 0): 0,0 0,93.4 257.2,93.4 257.2,0
VPOS on Layer 2 "VPOS_L02_P001" (solid, pour order 1): 0,0 0,94.8 257.2,94.8 257.2,0
VPOS on Layer 3 "VPOS_L03_P003" (solid, pour order 3): 0,0 0,94.8 257.2,94.8 257.2,0
VNEG on Bottom Layer "VNEG_L04_P012" (solid, remove dead copper, pour order 12): 0,0 0,94.8 257.2,94.8 257.2,0
VPOS on Bottom Layer "VPOS_L04_P011" (solid, pour order 11): 201.8,77.8 196.8,77.8 195,76 190.7,76 190.7,85.4 192.3,87 201.8,87
NetR110_1 on Bottom Layer "NETR110_1_L04_P010" (solid, pour order 10): 202.2,71.9 207,71.9 207,82.9 202.2,82.9
NetR116_1 on Bottom Layer "NETR116_1_L04_P008" (solid, pour order 8): 197.3,77.4 197.3,66.3 201.3,66.3 201.8,66.8 201.8,77.4
NetM100_2 on Bottom Layer "NETM100_2_L04_P002" (solid, pour order 2): 207,71.6 202.2,71.6 202.2,66.5 201.7,66 197.3,66 197.3,58.1 198.4,57 205.1,57 206,57.9 206,66 207,67 207,67.1

## Keep-outs
Keep-Out Layer:
  circle w6: c232.1,71.1 r3
  circle w6: c232.1,23.7 r3
  circle w6: c163.1,23.7 r3
  circle w6: c163.1,71.1 r3
  circle w6: c94.1,71.1 r3
  circle w6: c94.1,23.7 r3
  circle w6: c25.1,23.7 r3
  circle w6: c25.1,71.1 r3